# EAGLE board RC2014 Floppy WD37C65 (EAGLE 7.1.0)
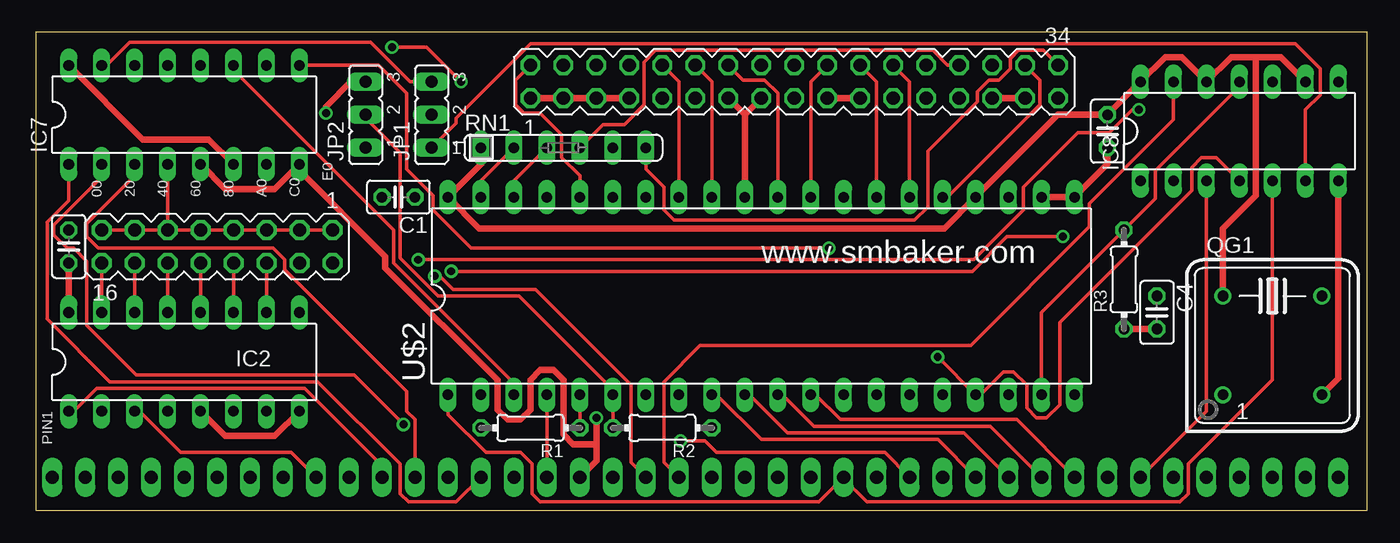
[diagram p0: board, top side]
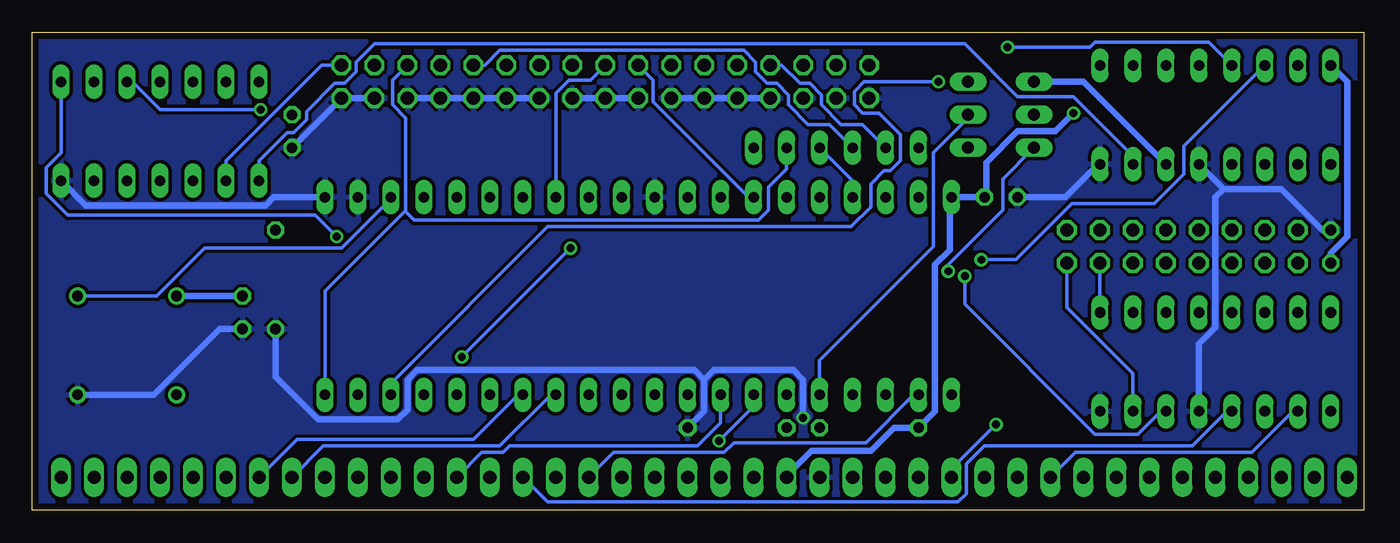
[diagram p1: board, bottom side, seen from below]

Size 102.54 x 36.82 mm. Coordinates in mm from the lower left corner, seen from the top.
Outline: 0,0 102.54,0 102.54,36.82 0,36.82 0,0
Copper layers (1*16): Top 0.035mm / dielectric 1.5mm / Bottom 0.035mm
Design rules "default *": minimum track width 10mil, minimum drill 24mil, track to track 10mil, track to pad 10mil, pad to pad 10mil, via to via 10mil, smd to smd 8mil, copper to edge 20mil, drill to drill 8mil, minimum pad ring 10mil, minimum via ring 8mil, stop-mask expansion 4mil, vias tented up to drill 25mil, thermal gap 10mil
Net classes: 1 PWR: width 0.508 mm

## Footprints (pad centres in the part's own frame; a part is rotated, then mirrored left to right if it is on the bottom)
C025-025X050 = drill 0.813 octagon: 1 -1.27,0; 2 1.27,0
DIL16 = drill 0.813 long: 1 -8.89,-3.81; 2 -6.35,-3.81; 3 -3.81,-3.81; 4 -1.27,-3.81; 5 1.27,-3.81; 6 3.81,-3.81; 7 6.35,-3.81; 8 8.89,-3.81; 9 8.89,3.81; 10 6.35,3.81; 11 3.81,3.81; 12 1.27,3.81; 13 -1.27,3.81; 14 -3.81,3.81; 15 -6.35,3.81; 16 -8.89,3.81
DIL14 = drill 0.813 long: 1 -7.62,-3.81; 2 -5.08,-3.81; 3 -2.54,-3.81; 4 0,-3.81; 5 2.54,-3.81; 6 5.08,-3.81; 7 7.62,-3.81; 8 7.62,3.81; 9 5.08,3.81; 10 2.54,3.81; 11 0,3.81; 12 -2.54,3.81; 13 -5.08,3.81; 14 -7.62,3.81
JP2 = drill 0.914 long: 1 -2.54,0; 2 0,0; 3 2.54,0
DIL08S = drill 0.813: 1 -3.81,-3.81; 4 3.81,-3.81; 5 3.81,3.81; 8 -3.81,3.81
0204/7 = drill 0.813 octagon: 1 -3.81,0; 2 3.81,0
SIL6 = drill 0.813 long: 1 -6.35,0; 2 -3.81,0; 3 -1.27,0; 4 1.27,0; 5 3.81,0; 6 6.35,0
MA08-2 = drill 1.016 octagon: 1 -8.89,-1.27; 2 -8.89,1.27; 3 -6.35,-1.27; 4 -6.35,1.27; 5 -3.81,-1.27; 6 -3.81,1.27; 7 -1.27,-1.27; 8 -1.27,1.27; 9 1.27,-1.27; 10 1.27,1.27; 11 3.81,-1.27; 12 3.81,1.27; 13 6.35,-1.27; 14 6.35,1.27; 15 8.89,-1.27; 16 8.89,1.27
SIP40 = drill 1.016 long: 1 -48.26,0; 2 -45.72,0; 3 -43.18,0; 4 -40.64,0; 5 -38.1,0; 6 -35.56,0; 7 -33.02,0; 8 -30.48,0; 9 -27.94,0; 10 -25.4,0; 11 -22.86,0; 12 -20.32,0; 13 -17.78,0; 14 -15.24,0; 15 -12.7,0; 16 -10.16,0; 17 -7.62,0; 18 -5.08,0; 19 -2.54,0; 20 0,0; 21 2.54,0; 22 5.08,0; 23 7.62,0; 24 10.16,0; 25 12.7,0; 26 15.24,0; 27 17.78,0; 28 20.32,0; 29 22.86,0; 30 25.4,0; 31 27.94,0; 32 30.48,0; 33 33.02,0; 34 35.56,0; 35 38.1,0; 36 40.64,0; 37 43.18,0; 38 45.72,0; 39 48.26,0; 40 50.8,0
DIL40 = drill 0.813 long: 1 -24.13,-7.62; 2 -21.59,-7.62; 3 -19.05,-7.62; 4 -16.51,-7.62; 5 -13.97,-7.62; 6 -11.43,-7.62; 7 -8.89,-7.62; 8 -6.35,-7.62; 9 -3.81,-7.62; 10 -1.27,-7.62; 11 1.27,-7.62; 12 3.81,-7.62; 13 6.35,-7.62; 14 8.89,-7.62; 15 11.43,-7.62; 16 13.97,-7.62; 17 16.51,-7.62; 18 19.05,-7.62; 19 21.59,-7.62; 20 24.13,-7.62; 21 24.13,7.62; 22 21.59,7.62; 23 19.05,7.62; 24 16.51,7.62; 25 13.97,7.62; 26 11.43,7.62; 27 8.89,7.62; 28 6.35,7.62; 29 3.81,7.62; 30 1.27,7.62; 31 -1.27,7.62; 32 -3.81,7.62; 33 -6.35,7.62; 34 -8.89,7.62; 35 -11.43,7.62; 36 -13.97,7.62; 37 -16.51,7.62; 38 -19.05,7.62; 39 -21.59,7.62; 40 -24.13,7.62
MA17-2 = drill 1.016 octagon: 1 -20.32,-1.27; 2 -20.32,1.27; 3 -17.78,-1.27; 4 -17.78,1.27; 5 -15.24,-1.27; 6 -15.24,1.27; 7 -12.7,-1.27; 8 -12.7,1.27; 9 -10.16,-1.27; 10 -10.16,1.27; 11 -7.62,-1.27; 12 -7.62,1.27; 13 -5.08,-1.27; 14 -5.08,1.27; 15 -2.54,-1.27; 16 -2.54,1.27; 17 0,-1.27; 18 0,1.27; 19 2.54,-1.27; 20 2.54,1.27; 21 5.08,-1.27; 22 5.08,1.27; 23 7.62,-1.27; 24 7.62,1.27; 25 10.16,-1.27; 26 10.16,1.27; 27 12.7,-1.27; 28 12.7,1.27; 29 15.24,-1.27; 30 15.24,1.27; 31 17.78,-1.27; 32 17.78,1.27; 33 20.32,-1.27; 34 20.32,1.27

## Placement (x,y rotation side)
C1  [C025-025X050]  27.94,24.13 180 top
C2  [C025-025X050]  82.55,29.21 270 top
C3  [C025-025X050]  2.54,20.32 90 top
C4  [C025-025X050]  86.36,15.24 270 top
IC2  74HCT138N  [DIL16]  11.43,11.43 0 top
IC7  74HCT138N  [DIL16]  11.43,30.48 0 top
IC8  74HCT125N  [DIL14]  92.71,29.21 0 top
JP1  [JP2]  30.48,30.48 90 top
JP2  [JP2]  25.4,30.48 90 top
QG1  16 Mhz  [DIL08S]  95.25,12.7 0 top
R1  [0204/7]  38.1,6.35 180 top
R2  [0204/7]  48.26,6.35 180 top
R3  [0204/7]  83.82,17.78 90 top
RN1  [SIL6]  40.64,27.94 0 top
SV1  [MA08-2]  13.97,20.32 180 top
U$1  RC2014  [SIP40]  49.53,2.54 0 top
U$2  WD37C65C  [DIL40]  55.88,16.51 0 top
U$3  FLOPPY34  [MA17-2]  58.42,33.02 0 top

## Library data of the parts
C1-C4 R1-R3 = resistor
IC2 IC7 IC8 = 74xx-eu
JP1 JP2 = jumper
QG1 = crystal; OC_FARNELL: unknown; OC_NEWARK: unknown
RN1 = resistor-sil; OC_FARNELL: unknown; OC_NEWARK: unknown
SV1 = con-lstb; OC_FARNELL: unknown; OC_NEWARK: unknown
U$1-U$3 = scott

## Nets
!DACK: JP1.2 R1.1 U$2.5
!DC: IC8.2 RN1.6 U$3.34
!DIR: U$2.28 U$3.18
!DSA: U$2.30 U$3.14
!DSB: U$2.32 U$3.12
!IDX: RN1.2 U$2.39 U$3.8
!MOTEA: U$2.33 U$3.10
!MOTEB: U$2.34 U$3.16
!RDD: RN1.5 U$2.20 U$3.30
!RESET: IC8.13 U$1.20
!SIDE: U$2.25 U$3.32
!STEP: U$2.29 U$3.20
!TR0: RN1.3 U$2.38 U$3.26
!WDATA: U$2.27 U$3.22
!WGATE: U$2.26 U$3.24
!WP: RN1.4 U$2.37 U$3.28
+5V [PWR]: C1.1 C2.1 C3.1 C4.1 IC2.16 IC7.6 IC7.16 IC8.9 IC8.12 IC8.14 JP2.3 QG1.8 R1.2 RN1.1 U$1.18 U$2.24 U$2.40
A0: U$1.16 U$2.4
A2: IC7.1 U$1.14
A3: IC7.2 U$1.13
A4: IC7.3 U$1.12
A5: IC2.1 U$1.11
A6: IC2.2 U$1.10
A7: IC2.3 U$1.9
CLK: QG1.5 U$2.23
D0: U$1.27 U$2.7
D1: U$1.28 U$2.8
D2: U$1.29 U$2.9
D3: U$1.30 U$2.10
D4: U$1.31 U$2.11
D5: U$1.32 U$2.12
D6: U$1.33 U$2.13
D7: IC8.3 U$1.34 U$2.14
DENSEL: U$2.36 U$3.2
FDC_CCR: IC7.13 U$2.18
FDC_CS: IC7.11 U$2.3
FDC_DOR: IC7.9 IC8.4 U$2.17
GND [PWR]: C1.2 C2.2 C3.2 C4.2 IC2.5 IC2.8 IC7.5 IC7.8 IC8.7 QG1.4 R2.1 R3.1 U$1.17 U$2.21 U$2.22 U$2.31 U$3.1 U$3.3 U$3.5 U$3.7 U$3.9 U$3.11 U$3.13 U$3.15 U$3.17 U$3.19 U$3.21 U$3.23 U$3.25 U$3.27 U$3.29 U$3.31 U$3.33
N$1: IC2.6 U$1.19
N$2: IC2.4 U$1.26
N$3: IC7.4 SV1.1 SV1.3 SV1.5 SV1.7 SV1.9 SV1.11 SV1.13 SV1.15
N$5: IC7.7 IC8.1
N$7: IC2.15 SV1.16
N$8: IC2.14 SV1.14
N$9: IC2.13 SV1.12
N$10: IC2.12 SV1.10
N$11: IC2.11 SV1.8
N$12: IC2.10 SV1.6
N$13: IC2.9 SV1.4
N$14: IC2.7 SV1.2
N$16: IC8.8 JP2.1
PORT00: IC7.15 JP1.3
PORT04: IC7.14 IC8.10
RD: IC8.5 U$1.25 U$2.1
RD_FDC_DOR: IC8.6 JP1.1
RESET: IC8.11 R3.2 U$2.19
TC: JP2.2 R2.2 U$2.6
WR: U$1.24 U$2.2

## Tracks (layer width: path | path; a pad name or v marks a point on that pad's centre or on a via)
!DACK
  Top 0.254: U$2.5 R1.1
  Bottom 0.254: JP1.2 30.48,30.23 33.15,27.56 33.15,20.32 41.91,11.56 U$2.5
!DC
  Top 0.254: RN1.6 46.99,26.29 48.39,24.89 48.39,23.11 49.15,22.35 67.69,22.35 68.71,23.37 68.71,27.69 72.52,31.5 72.52,32.26 73.41,33.15 74.17,33.15 75.06,34.04 75.06,34.8 75.69,35.43 77.6,35.43 U$3.34
  Bottom 0.254: IC8.2 87.63,26.92 80.26,34.29 U$3.34
!DIR
  Bottom 0.254: U$2.28 62.23,32.13 61.21,33.15 59.56,33.15 U$3.18
!DSA
  Top 0.254: U$2.30 57.15,32.13 56.13,33.15 54.48,33.15 U$3.14
!DSB
  Top 0.254: U$2.32 52.07,33.02 U$3.12
!IDX
  Top 0.254: U$2.39 34.29,25.4 RN1.2
  Bottom 0.254: U$3.8 44.83,34.29 43.43,32.89 42.67,32.89 41.78,32 41.78,31.24 40.26,29.72 38.61,29.72 RN1.2
!MOTEA
  Top 0.254: U$2.33 49.53,33.02 U$3.10
!MOTEB
  Bottom 0.254: U$2.34 47.37,24.13 54.74,31.5 54.74,33.15 U$3.16
!RDD
  Bottom 0.254: U$2.20 80.01,16.89 73.85,23.05 | 73.85,23.05 73.79,23.11 73.79,30.23 74.8,31.24 74.8,33.15 U$3.30 | RN1.5 44.45,26.29 45.85,24.89 45.85,23.11 46.61,22.35 73.15,22.35 73.85,23.05
!RESET
  Top 0.254: IC8.13 87.63,30.1 81.15,23.62 81.15,21.84 72.01,12.7 51.18,12.7 48.39,9.91 48.39,3.68 U$1.20
!SIDE
  Top 0.254: U$2.25 70.23,24.13 77.34,31.24 77.34,33.15 U$3.32
!STEP
  Top 0.254: U$2.29 59.69,33.02 U$3.20
!TR0
  Top 0.254: U$2.38 36.83,25.4 RN1.3
  Bottom 0.254: U$3.26 67.69,34.29 66.55,35.43 47.75,35.43 46.86,34.54 46.86,33.78 45.97,32.89 45.21,32.89 44.32,32 44.32,31.24 42.8,29.72 41.15,29.72 RN1.3
!WDATA
  Top 0.254: U$2.27 64.77,33.02 U$3.22
!WGATE
  Top 0.254: U$2.26 67.31,33.02 U$3.24
!WP
  Top 0.254: U$3.28 70.23,34.29 69.09,35.43 47.75,35.43 46.86,34.54 46.86,31.24 45.34,29.72 43.69,29.72 RN1.4
  Bottom 0.254: U$2.37 39.37,25.4 RN1.4
+5V  (via drill 0.61)
  Top 0.508: IC8.9 95.89,34.92 93.98,34.92 | 93.98,34.92 92.08,34.92 IC8.12 88.27,34.92 87,34.92 IC8.14 C2.1 78.74,30.48 U$2.24 69.98,21.72 34.16,21.72 U$2.40 34.29,26.67 RN1.1 | QG1.8 91.44,21.72 93.98,24.26 93.98,34.92 | C3.1 IC2.16 | IC7.16 8.26,28.57 13.34,28.57 IC7.6 | v22.35,30.61 22.35,31.11 24.26,33.02 JP2.3
  Bottom 0.508: QG1.8 C4.1 | U$1.18 44.45,2.67 42.55,4.57 37.97,4.57 36.2,6.35 R1.2 33.02,7.62 33.02,18.92 31.88,20.07 31.88,24 U$2.40 C1.1 29.08,24.26 29.08,26.8 26.67,29.21 23.75,29.21 v22.35,30.61 | IC7.6 21.59,33.02 JP2.3 | C3.1 2.54,19.81 1.27,21.08 1.27,33.02 IC7.16
A0
  Top 0.254: U$1.16 U$2.4
A2
  Top 0.254: IC7.1 2.54,23.88 0.89,22.23 0.89,14.73 5.71,9.91 21.72,9.91 28.07,3.56 28.07,1.27 28.7,0.64 32.38,0.64 U$1.14
A3  (via drill 0.61)
  Top 0.254: IC7.2 5.08,25.65 1.4,21.97 1.4,21.21 2.41,20.19 2.92,20.19 3.94,19.18 3.94,14.22 7.75,10.41 24.51,10.41 v28.32,6.6
  Bottom 0.254: v28.32,6.6 31.75,3.17 U$1.13
A4
  Top 0.254: IC7.3 7.62,25.78 3.94,22.1 3.94,21.08 4.83,20.19 18.29,20.19 19.18,19.3 19.18,18.54 28.57,9.14 28.57,7.62 29.21,6.99 U$1.12
A5
  Top 0.254: IC2.1 2.92,7.62 4.7,9.4 20.7,9.4 26.67,3.43 U$1.11
A6
  Bottom 0.254: IC2.2 5.46,7.62 8.64,4.45 22.23,4.45 U$1.10
A7
  Top 0.254: IC2.3 8,7.62 11.18,4.45 19.68,4.45 U$1.9
CLK
  Bottom 0.254: QG1.5 92.96,16.51 89.28,20.19 78.74,20.19 74.93,24 U$2.23
D0  (via drill 0.61)
  Top 0.254: v49.66,5.33 51.56,5.33 52.45,4.45 65.41,4.45 U$1.27
  Bottom 0.254: U$2.7 46.99,8 v49.66,5.33
D1
  Bottom 0.254: U$2.8 49.53,6.73 51.31,4.95 65.79,4.95 66.29,4.45 67.94,4.45 U$1.28
D2
  Top 0.254: U$2.9 52.45,8.89 55.88,5.46 69.47,5.46 U$1.29
D3
  Top 0.254: U$2.10 54.99,8.89 57.91,5.97 71.5,5.97 U$1.30
D4
  Top 0.254: U$2.11 57.53,8.89 59.94,6.48 73.53,6.48 U$1.31
D5
  Top 0.254: U$2.12 60.07,8.89 61.98,6.99 75.56,6.99 U$1.32
D6
  Bottom 0.254: U$2.13 62.61,8.89 66.55,4.95 80.14,4.95 U$1.33
D7
  Top 0.254: IC8.3 90.17,7.62 U$1.34
  Bottom 0.254: U$2.14 65.15,8.89 68.58,5.46 82.17,5.46 U$1.34
DENSEL
  Top 0.254: U$2.36 41.91,25.78 40.51,27.18 40.51,28.96 38.86,30.61 37.59,30.61 36.96,31.24 36.96,33.15 U$3.2
FDC_CCR  (via drill 0.61)
  Top 0.254: v32.77,33.02 30.1,35.69 v27.43,35.69
  Bottom 0.254: U$2.18 74.93,9.78 62.87,21.84 39.5,21.84 37.97,23.37 37.97,25.15 36.96,26.16 36.45,26.16 35.69,26.92 35.69,28.96 37.34,30.61 38.61,30.61 39.24,31.24 39.24,32.26 38.48,33.02 v32.77,33.02 | v27.43,35.69 21.08,35.69 20.7,36.07 11.94,36.07 IC7.13
FDC_CS
  Top 0.254: IC7.11 15.24,33.91 27.56,21.59 27.56,19.05 36.83,9.78 U$2.3
FDC_DOR  (via drill 0.61)
  Top 0.254: IC8.4 90.93,27.18 89.79,27.18 89.03,26.42 89.03,24.64 78.87,14.48 78.87,8.13 77.85,7.11 77.09,7.11 76.33,7.87 76.33,9.65 75.31,10.67 74.55,10.67 72.77,8.89 U$2.17 v69.47,11.81 | IC7.9 26.42,34.29 28.57,32.13 28.57,26.29 30.61,24.26 30.61,23.11 33.53,20.19 v61.09,20.19
  Bottom 0.254: v69.47,11.81 v61.09,20.19
GND  (via drill 0.61)
  Top 0.508: U$3.1 U$3.3 U$3.5 U$3.7 | U$2.22 U$2.21 82.55,26.67 C2.2 | 54.61,30.48 U$2.31 | U$3.13 54.61,30.48 | 54.61,30.48 U$3.15 | U$3.19 U$3.21 | U$3.29 U$3.31 | IC2.5 14.61,5.71 18.41,5.71 IC2.8 | IC7.5 14.61,24.77 18.41,24.77 IC7.8 20.19,26.29 26.92,19.56 26.92,18.67 35.56,10.03 35.56,7.75 36.32,6.99 37.34,6.99 38.1,7.75 38.1,10.03 38.86,10.79 39.88,10.79 40.64,10.03 40.64,5.84 41.4,5.08 43.18,5.08 | 43.18,5.08 43.18,3.81 U$1.17 | 43.18,5.08 v43.18,7.11 | C4.2 R3.1 | IC8.7 100.33,10.16 QG1.4
  Bottom 0.508: U$3.7 U$3.9 U$3.11 U$3.13 | U$3.15 U$3.17 U$3.19 | U$3.21 U$3.23 U$3.25 U$3.27 U$3.29 | U$3.31 U$3.33 C2.2 | C1.2 22.99,24.13 20.45,26.67 IC7.8 | C3.2 3.17,21.59 6.35,24.77 10.79,24.77 | IC7.5 10.79,24.77 | IC2.5 12.7,12.83 11.43,14.1 11.43,24.13 10.79,24.77 | R2.1 50.8,7.62 50.8,10.03 | 50.8,10.03 50.04,10.79 43.94,10.79 43.18,10.03 v43.18,7.11 | QG1.4 93.22,8.89 88.14,13.97 C4.2 | 50.8,10.03 51.56,10.79 72.9,10.79 73.66,10.03 73.66,7.75 74.42,6.99 80.52,6.99 83.82,10.29 R3.1 | U$2.21 83.95,24.13 84.58,23.5 98.42,23.5 IC8.7
  pour Bottom: 0,0 0,36.83 102.87,36.83 102.87,0
N$1  (via drill 0.61)
  Top 0.254: v30.73,18.03 31.11,18.03 32.13,17.02 38.48,17.02 45.85,9.65 45.85,3.68 U$1.19
  Bottom 0.254: IC2.6 15.62,7.62 17.4,5.84 20.7,5.84 30.73,15.88 v30.73,18.03
N$2
  Bottom 0.254: IC2.4 10.54,7.62 13.21,4.95 29.21,4.95 30.61,3.56 30.61,1.27 31.24,0.64 62.87,0.64 U$1.26
N$3
  Top 0.254: SV1.15 SV1.13 SV1.11 | SV1.11 IC7.4 | SV1.11 SV1.9 SV1.7 SV1.5 SV1.3 SV1.1
N$5
  Bottom 0.254: IC7.7 17.78,27.3 22.35,31.88 26.67,31.88 30.73,35.94 76.2,35.94 77.6,34.54 77.6,33.78 78.49,32.89 79.25,32.89 81.41,30.73 81.41,30.1 82.42,29.08 82.93,29.08 85.09,26.92 IC8.1
N$7
  Top 0.254: SV1.16 IC2.15
N$8
  Top 0.254: SV1.14 IC2.14
N$9
  Top 0.254: SV1.12 IC2.13
N$10
  Top 0.254: SV1.10 IC2.12
N$11
  Top 0.254: SV1.8 IC2.11
N$12
  Top 0.254: SV1.6 IC2.10
N$13
  Bottom 0.254: SV1.4 IC2.9
N$14
  Bottom 0.254: IC2.7 17.78,10.54 22.86,15.62 SV1.2
N$16  (via drill 0.61)
  Top 0.254: v79.12,21.08 74.8,21.08 72.14,18.41 v32,18.41
  Bottom 0.254: IC8.8 100.33,27.56 101.47,26.42 101.47,24.38 99.82,22.73 80.77,22.73 v79.12,21.08 | v32,18.41 32,18.92 27.81,23.11 27.81,25.53 JP2.1
PORT00
  Top 0.254: IC7.15 5.46,34.29 7.24,36.07 25.78,36.07 28.83,33.02 JP1.3
PORT04  (via drill 0.61)
  Top 0.254: v84.96,30.86 84.45,30.86 82.68,29.08 80.26,29.08 76.07,24.89 76.07,23.11 72.26,19.3 v29.46,19.3
  Bottom 0.254: IC8.10 94.87,33.02 92.71,30.86 v84.96,30.86 | v29.46,19.3 26.8,19.3 22.48,23.62 16.13,23.62 13.84,25.91 13.84,28.07 IC7.14
RD
  Top 0.254: U$2.1 31.75,7.37 34.67,4.45 37.34,4.45 38.23,3.56 38.23,1.27 38.86,0.64 60.33,0.64 U$1.25 62.23,2.41 64.01,0.64 88.14,0.64 88.77,1.27 88.77,3.56 95.25,10.03 IC8.5
RD_FDC_DOR
  Top 0.254: IC8.6 97.79,30.86 98.93,32 98.93,34.04 97.03,35.94 38.1,35.94 32.38,30.23 32.38,29.84 JP1.1
RESET
  Top 0.254: U$2.19 77.47,15.24 R3.2 86.23,24 86.23,26.16 92.71,32.64 IC8.11
TC
  Top 0.254: R2.2 U$2.6 44.45,9.27 37.21,16.51 30.99,16.51 28.07,19.43 28.07,27.56 25.4,30.23 JP2.2
WR
  Bottom 0.254: U$2.2 34.67,8.89 38.35,5.21 48.51,5.21 49.28,4.45 57.78,4.45 U$1.24

## Text on the board
tPlace: E0 | 00 | 20 | 40 | 60 | 80 | A0 | C0 | www.smbaker.com | PIN1